# EAGLE board Secondary Board 2d PCB v7 (EAGLE 9.7.0)
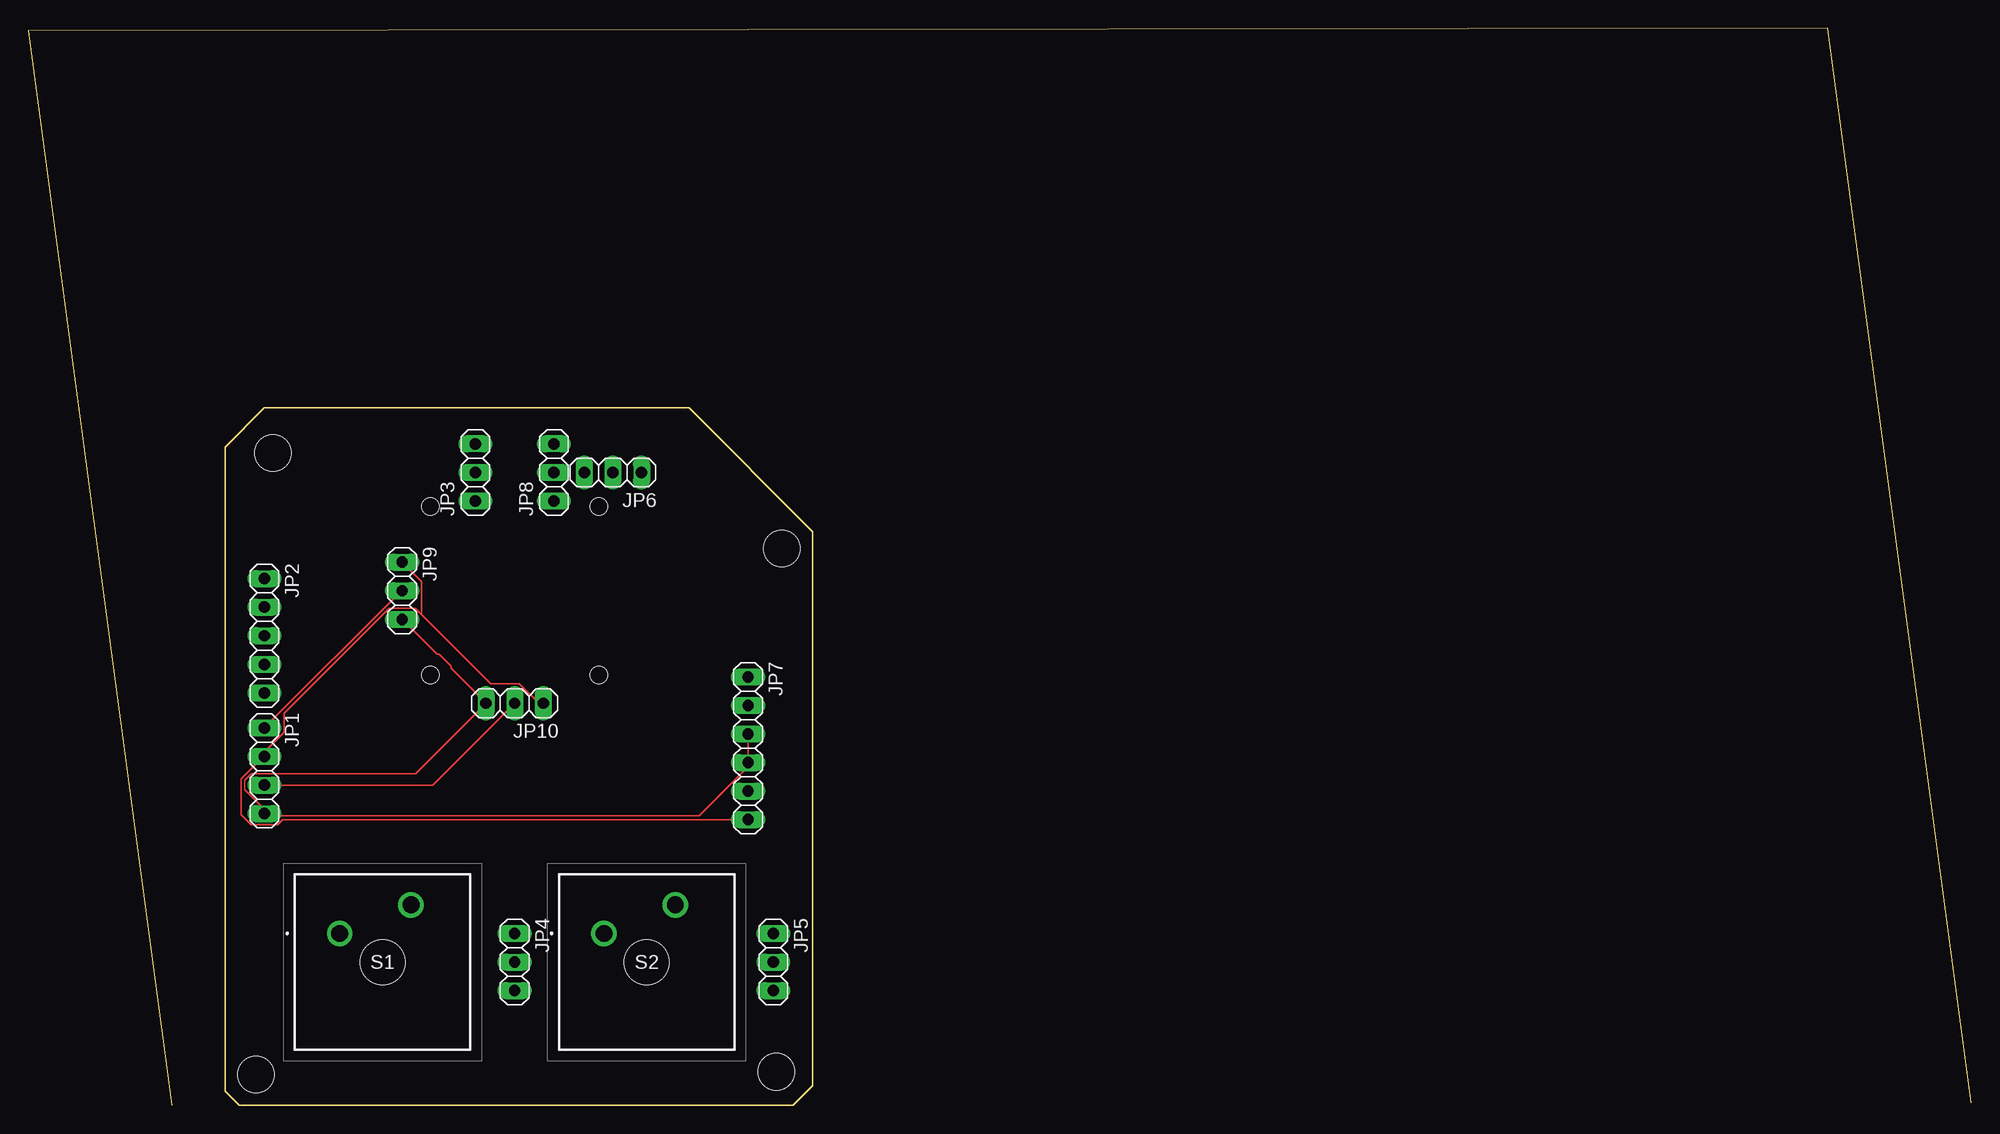
[diagram p0: board, top side]
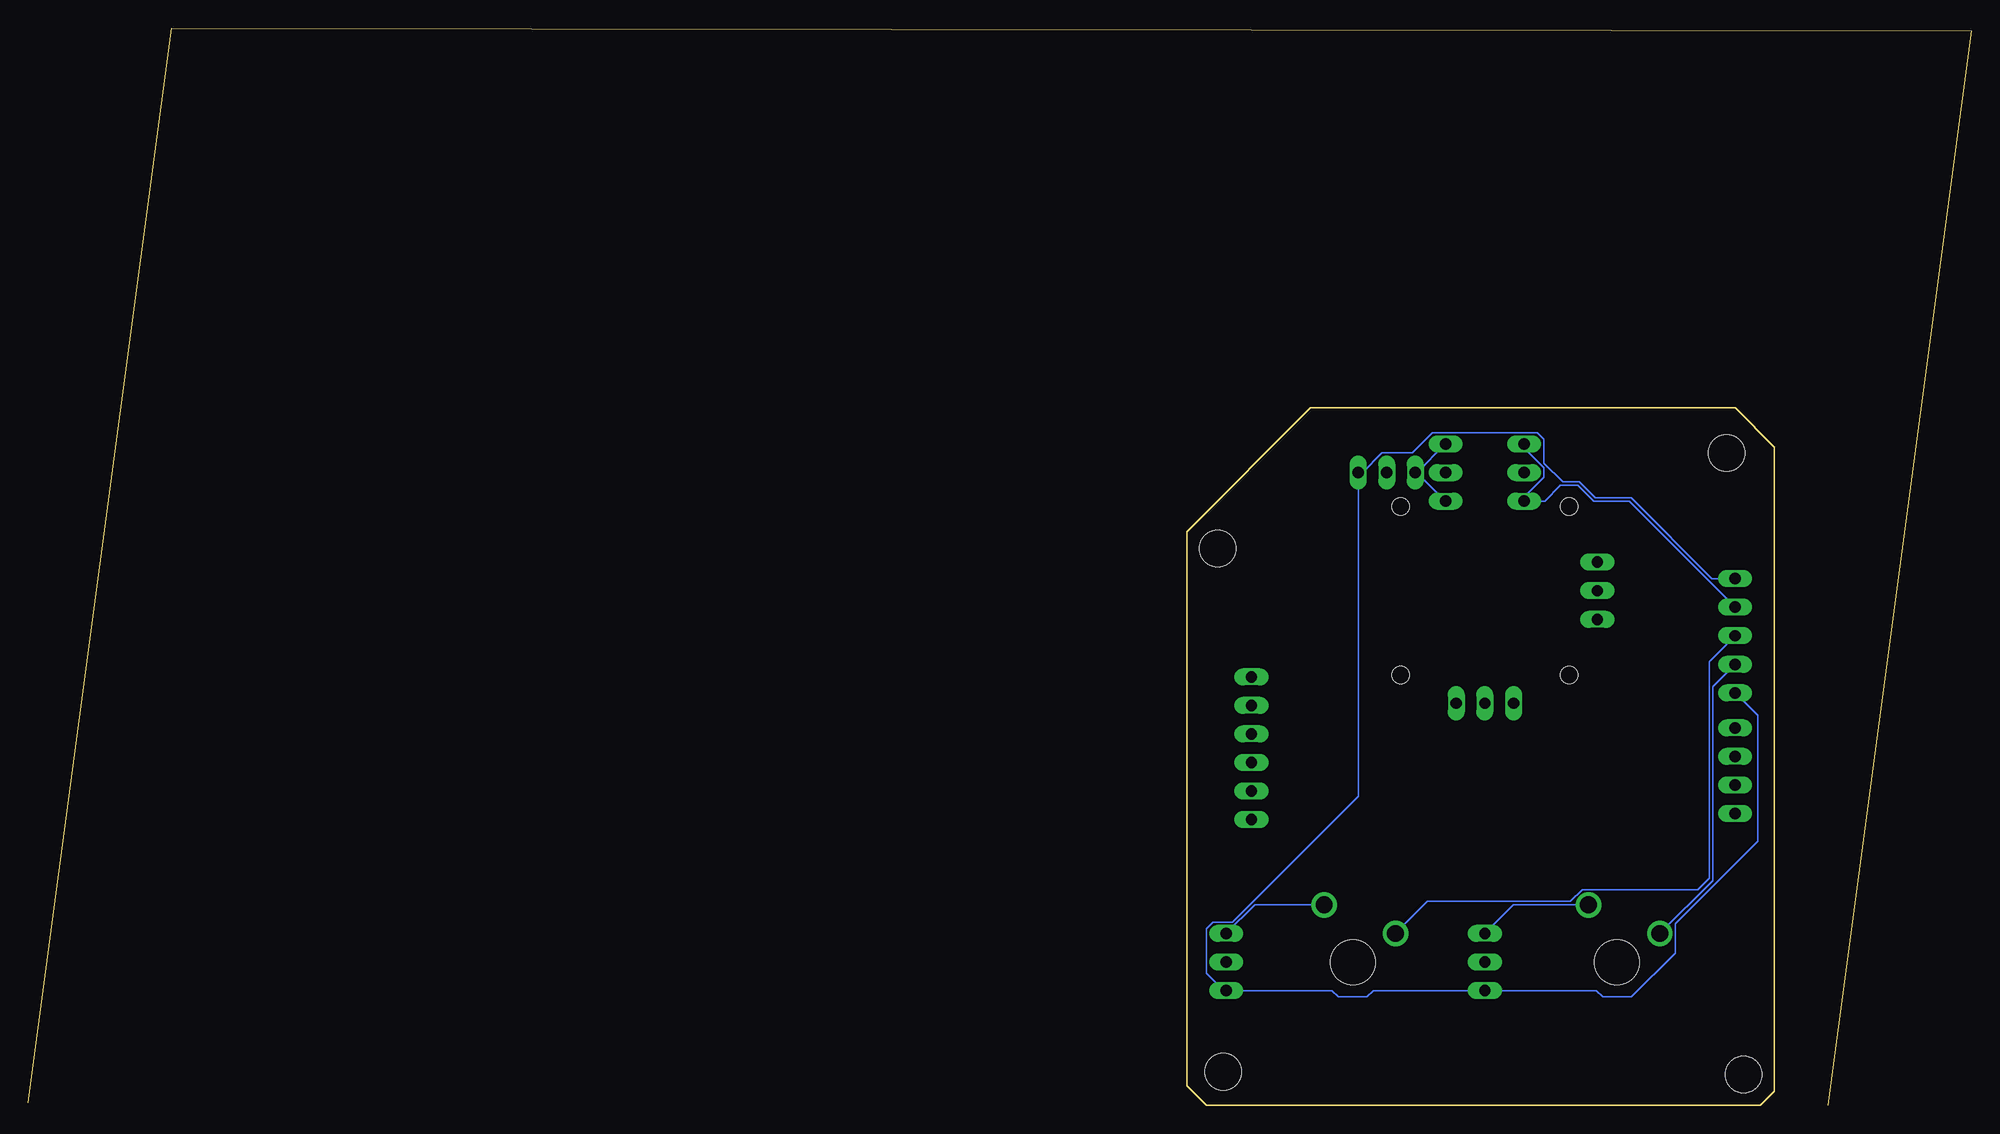
[diagram p1: board, bottom side, seen from below]

Size 172.75 x 95.75 mm. Coordinates in mm from the lower left corner, seen from the top.
Outline: 172.75,0.25 160,95.75 0,95.5 12.75,0
Outline: 18.75,0 17.5,1.25 17.5,58.5 21,62 58.75,62 69.75,51 69.75,1.75 68,0 18.75,0
Copper layers (1*16): Top / Bottom
Stack-up Default Layer Stack: Top User Defined 0.035mm / Dielectric-1 User Defined 1.5mm / Bottom User Defined 0.035mm
Design rules "default": minimum track width 6mil, minimum drill 0.35mm, track to track 6mil, track to pad 6mil, pad to pad 6mil, via to via 6mil, smd to smd 6mil, copper to edge 40mil, drill to drill 6mil, minimum pad ring 10mil, minimum via ring 8mil, stop-mask expansion 4mil, vias tented up to drill 0mil, thermal gap 10mil
Holes 1.55 mm at 50.75,38.25 35.75,38.25 35.75,53.25 50.75,53.25
Holes 3.25 mm at 21.75,58 20.25,2.75 66.5,3 67,49.5

## Footprints (pad centres in the part's own frame; a part is rotated, then mirrored left to right if it is on the bottom)
1X04 = drill 1.016 long: 1 -3.81,0; 2 -1.27,0; 3 1.27,0; 4 3.81,0
1X05 = drill 1.016 long: 1 -5.08,0; 2 -2.54,0; 3 0,0; 4 2.54,0; 5 5.08,0
1X03 = drill 1.016 long: 1 -2.54,0; 2 0,0; 3 2.54,0
1X06 = drill 1.016 long: 1 -6.35,0; 2 -3.81,0; 3 -1.27,0; 4 1.27,0; 5 3.81,0; 6 6.35,0
MX1AE1NW = drill 1.499 pad 2.248: 1 0,0; 2 6.35,2.54 | hole 3.988: 3.81,-2.54

## Placement (x,y rotation side)
JP1  PINHD-1X4  [1X04]  21,29.75 270 top
JP2  PINHD-1X5  [1X05]  21,41.75 270 top
JP3  PINHD-1X3  [1X03]  39.75,56.25 90 top
JP4  PINHD-1X3  [1X03]  43.25,12.75 270 top
JP5  PINHD-1X3  [1X03]  66.25,12.75 270 top
JP6  PINHD-1X3  [1X03]  51.98,56.25 180 top
JP7  PINHD-1X6  [1X06]  64,31.75 270 top
JP8  PINHD-1X3  [1X03]  46.75,56.25 90 top
JP9  PINHD-1X3  [1X03]  33.25,45.75 270 top
JP10  PINHD-1X3  [1X03]  43.25,35.75 180 top
S1  MX1A-E1NW  [MX1AE1NW]  27.69,15.29 0 top
S2  MX1A-E1NW  [MX1AE1NW]  51.19,15.29 0 top

## Library data of the parts
JP1-JP10 = Connector; CATEGORY: CONNECTOR; SUB-CATEGORY: PIN-HEADER
S1 S2 = SamacSys_Parts; DESCRIPTION: Pushbutton Switches Full Travel, Mech. Keyswitch, Click Tactile Feel (Blue stem), 60cN, No LED, No Diode, Fixation Pins for PCB Mounting; HEIGHT: 15.2mm; MANUFACTURER_NAME: Cherry; MANUFACTURER_PART_NUMBER: MX1A-E1NW; MOUSER_PART_NUMBER: 540-MX1A-E1NW; MOUSER_PRICE-STOCK: https://www.mouser.co.uk/ProductDetail/CHERRY/MX1A-E1NW/?qs=Z7NFYKyvgJd45Wm4xzFv7w%3D%3D

## Nets
N$1: JP1.4 JP7.3 JP7.4 JP9.3 JP10.3
N$2: JP1.2 JP7.6 JP9.1 JP10.1
N$3: JP4.1 S1.2
N$4: JP5.1 S2.2
N$5: JP1.1 JP9.2
N$6: JP6.3 JP8.1 JP8.3
N$7: JP2.1 JP2.5 JP4.3 JP5.3 JP6.1
N$8: JP2.3 S2.1
N$9: JP2.4 S1.1
N$10: JP1.3 JP10.2
N$11: JP2.2 JP3.1 JP3.3

## Tracks (layer width: path | path; a pad name or v marks a point on that pad's centre or on a via)
N$1
  Top 0.152: JP7.3 JP7.4 64,30.1 59.65,25.75 21.06,25.75 21,25.81 JP1.4 21,26.32 19.25,28.07 19.25,28.89 19.83,29.47 34.43,29.47 JP10.3 37.62,38.84 37.62,39.02 36.52,40.12 36.34,40.12 JP9.3
N$2
  Top 0.152: 35,43.62 41.12,37.5 43.66,37.5 45.41,35.75 JP10.1 | JP7.6 22.62,25.4 22.17,24.95 19.83,24.95 18.94,25.83 18.94,29.02 20.95,31.02 JP1.2 21,31.4 22.75,33.15 22.75,34.88 32.08,44.2 34.42,44.2 35,43.62 | JP9.1 35,46.54 35,43.62
N$3
  Bottom 0.152: S1.2 40.71,17.83 JP4.1
N$4
  Bottom 0.152: S2.2 63.71,17.83 JP5.1
N$5
  Top 0.152: JP1.1 33.2,45.76 JP9.2
N$6
  Bottom 0.152: JP8.1 49.29,56.25 | 49.29,56.25 JP8.3 | 49.29,56.25 JP6.3
N$7
  Bottom 0.152: JP2.5 19,34.67 19,23.5 26.34,16.16 26.34,13.55 30.22,9.66 32.78,9.66 33.32,10.21 JP4.3 53.18,10.21 53.72,9.66 56.28,9.66 56.82,10.21 JP5.3 66.46,10.21 68,11.75 68,15.7 67.42,16.28 65.69,16.28 54.5,27.47 54.5,56.23 JP6.1 | JP6.1 | JP2.1 23.08,46.83 30.25,54 30.5,54 30.52,54.02 33.44,54.02 34.85,55.42 36.33,55.42 38,57.09 38,59.2 38.58,59.78 47.92,59.78 49.7,58 52.39,58 54.15,56.24 JP6.1
N$8
  Bottom 0.152: JP2.3 23.3,39.45 23.3,20.2 24.32,19.18 34.6,19.18 35.65,18.14 48.34,18.14 S2.1
N$9
  Bottom 0.152: S1.1 23,19.98 23,37.21 JP2.4
N$10
  Top 0.152: JP10.2 35.98,28.48 JP1.3
N$11
  Bottom 0.152: JP3.3 39.75,58.41 38,56.66 38,55.84 39.75,54.09 JP3.1 37.93,53.71 36.52,55.12 34.98,55.12 33.57,53.71 30.64,53.71 30.63,53.7 30.41,53.7 JP2.2